# EAGLE board LoRa ST v4.1 (EAGLE 9.6.2)
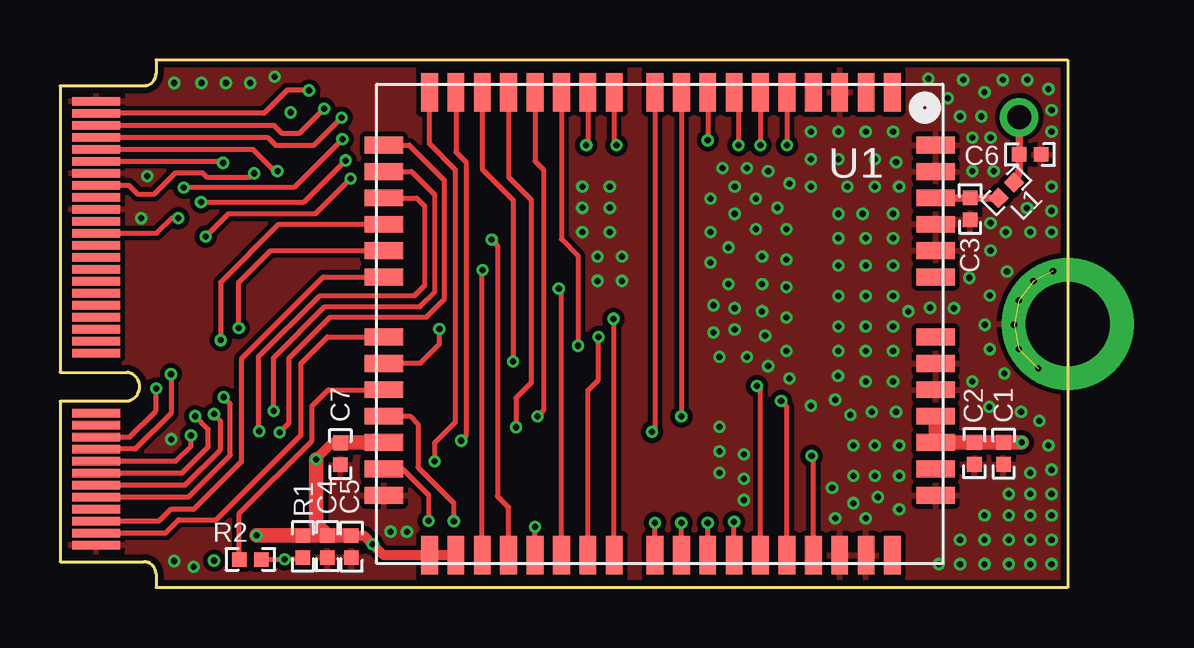
[diagram p0: board, top side]
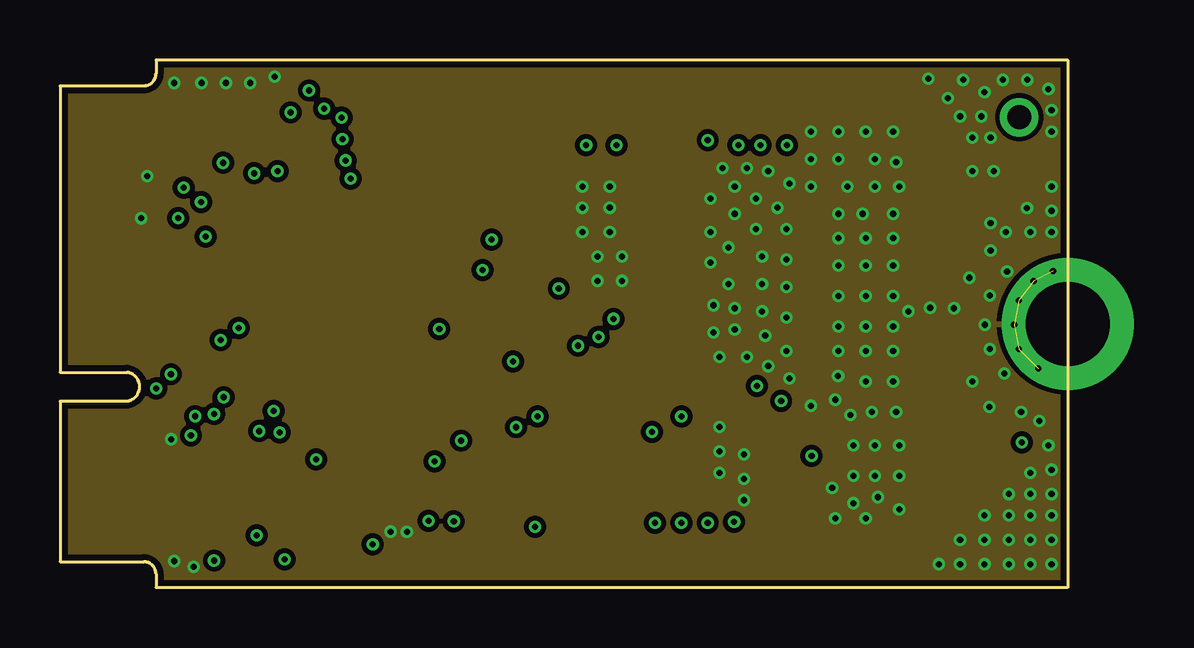
[diagram p1: board, inner layer Route2]
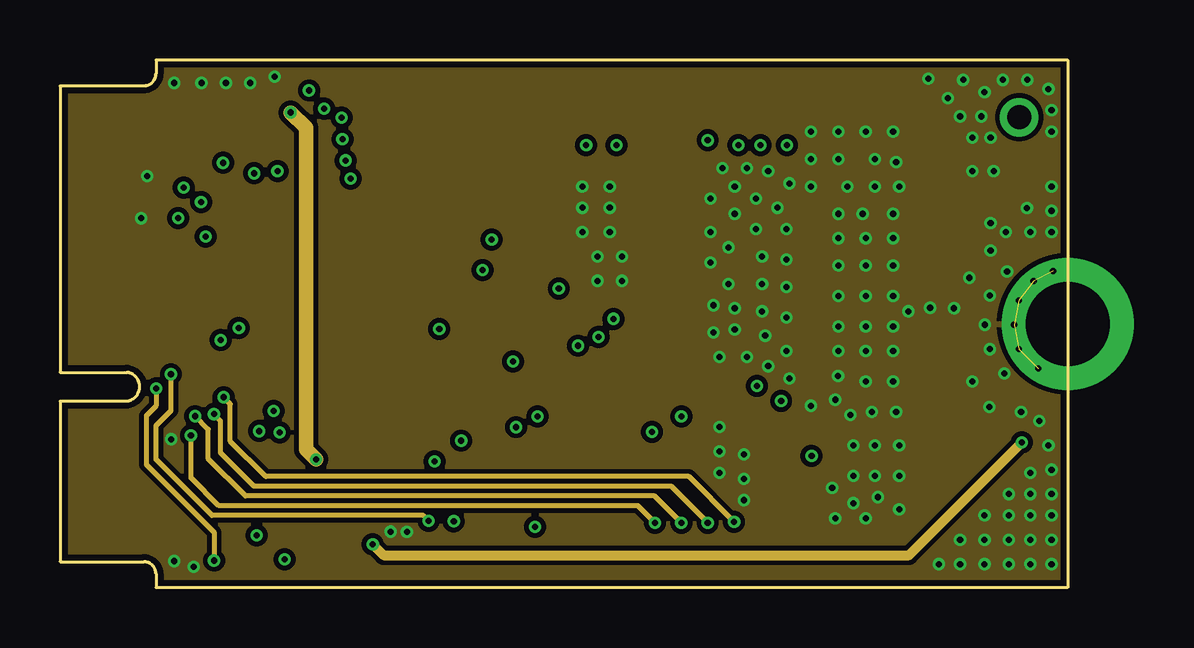
[diagram p2: board, inner layer Route15]
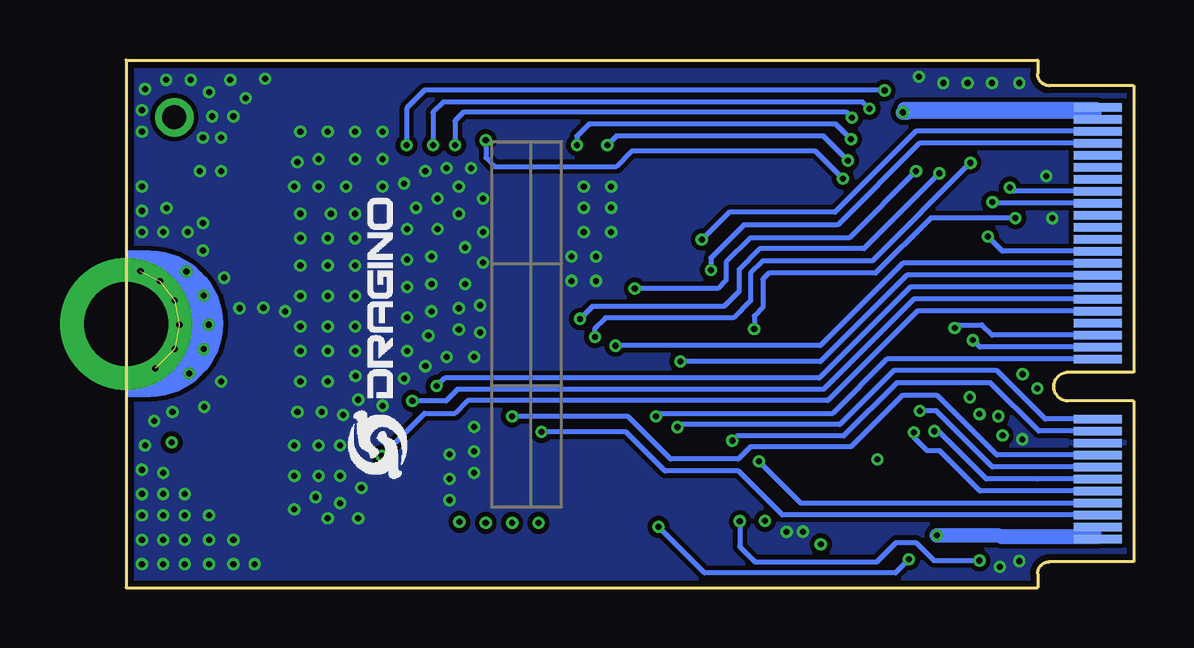
[diagram p3: board, bottom side, seen from below]

Size 42 x 22 mm. Coordinates in mm from the lower left corner, seen from the top.
Copper layers (1*2+15*16): Top 0.035mm / dielectric 1.5mm / Route2 0.035mm / dielectric 0.15mm / Route15 0.035mm / dielectric 0.2mm / Bottom 0.035mm
Design rules "default *": minimum track width 7mil, minimum drill 7mil, track to track 8mil, track to pad 8mil, pad to pad 8mil, via to via 8mil, smd to smd 8mil, copper to edge 10mil, drill to drill 6mil, minimum pad ring 5mil, minimum via ring 5mil, stop-mask expansion 1mil, vias tented up to drill 30mil, thermal gap 8mil
Net classes: 0 default: width 0.203 mm, clearance 0.152 mm; 1 vcc: width 0.254 mm; 2 gnd: width 0.305 mm, drill 0.33 mm, clearance 0.254 mm; 3 2layer-50ohm: width 0.305 mm, clearance 0.152 mm; 6 usbtrace-4layer: width 0.191 mm, clearance 0.152 mm

## Footprints (pad centres in the part's own frame; a part is rotated, then mirrored left to right if it is on the bottom)
C0402 = smd 0.61 x 0.61: 1 -0.457,0; 2 0.457,0
L-0402 = smd 0.61 x 0.61: 1 -0.457,0; 2 0.457,0
R0402 = smd 0.61 x 0.61: 1 -0.457,0; 2 0.457,0
LA66_APPLICATION_FRAME = smd 1.6 x 0.7: 1 -9.65,9.7; 2 -9.65,8.6; 3 -9.65,7.5; 4 -9.65,6.4; 5 -9.65,5.3; 6 -9.65,4.2; 7 -9.65,3.1; 8 -9.65,2; 9 -9.65,0.9; 10 -9.65,-0.2; 11 -9.65,-1.9; 12 -9.65,-3; 13 -9.65,-4.1; 14 -9.65,-5.2; 15 -9.65,-6.3; 16 -9.65,-7.4; 17 -9.65,-8.5; 18 -9.65,-9.6; 32 9.65,-9.6; 33 9.65,-8.5; 34 9.65,-7.4; 35 9.65,-6.3; 36 9.65,-5.2; 37 9.65,-4.1; 38 9.65,-3; 39 9.65,-1.9; 40 9.65,-0.2; 41 9.65,0.9; 42 9.65,2; 43 9.65,3.1; 44 9.65,4.2; 45 9.65,5.3; 46 9.65,6.4; 47 9.65,7.5; 48 9.65,8.6; 49 9.65,9.7 | smd 0.7 x 1.6: 19 -7.45,-11.5; 20 -6.35,-11.5; 21 -5.25,-11.5; 22 -4.15,-11.5; 23 -3.05,-11.5; 24 -1.95,-11.5; 25 0.55,-11.5; 26 1.65,-11.5; 27 2.75,-11.5; 28 3.85,-11.5; 29 4.95,-11.5; 30 6.05,-11.5; 31 7.15,-11.5; 50 7.15,11.5; 51 6.05,11.5; 52 4.95,11.5; 53 3.85,11.5; 54 2.75,11.5; 55 1.65,11.5; 56 0.55,11.5; 57 -1.95,11.5; 58 -3.05,11.5; 59 -4.15,11.5; 60 -5.25,11.5; 61 -6.35,11.5; 62 -7.45,11.5
LORA_ST_PCB = smd 0.35 x 2: 1 20.225,-40.5; 3 19.725,-40.5; 5 19.225,-40.5; 7 18.725,-40.5; 9 18.225,-40.5; 11 17.725,-40.5; 13 17.227,-40.5; 15 16.725,-40.5; 17 16.225,-40.5; 19 15.725,-40.5; 21 15.225,-40.5; 23 14.725,-40.5; 33 12.225,-40.5; 35 11.725,-40.5; 37 11.225,-40.5; 39 10.725,-40.5; 41 10.225,-40.5; 43 9.725,-40.5; 45 9.225,-40.5; 47 8.725,-40.5; 49 8.225,-40.5; 51 7.725,-40.5; 53 7.225,-40.5; 55 6.725,-40.5; 57 6.225,-40.5; 59 5.725,-40.5; 61 5.225,-40.5; 63 4.725,-40.5; 65 4.225,-40.5; 67 3.725,-40.5; 69 3.225,-40.5; 71 2.725,-40.5; 73 2.225,-40.5; 75 1.725,-40.5 | smd 0.35 x 2 bottom: 2 19.975,-40.5; 4 19.475,-40.5; 6 18.975,-40.5; 8 18.475,-40.5; 10 17.975,-40.5; 12 17.475,-40.5; 14 16.975,-40.5; 16 16.475,-40.5; 18 15.975,-40.5; 20 15.475,-40.5; 22 14.975,-40.5; 32 12.475,-40.5; 34 11.975,-40.5; 36 11.475,-40.5; 38 10.975,-40.5; 40 10.475,-40.5; 42 9.975,-40.5; 44 9.475,-40.5; 46 8.975,-40.5; 48 8.475,-40.5; 50 7.975,-40.5; 52 7.475,-40.5; 54 6.975,-40.5; 56 6.475,-40.5; 58 5.975,-40.5; 60 5.475,-40.5; 62 4.975,-40.5; 64 4.475,-40.5; 66 3.975,-40.5; 68 3.475,-40.5; 70 2.975,-40.5; 72 2.475,-40.5; 74 1.975,-40.5 | drill 3.5 pad 5.5: 76 11,0

## Placement (x,y rotation side)
C1  2.2uF  [C0402]  39.33,5.59 90 top
C2  0.1uF  [C0402]  38.11,5.59 270 top
C3  NC  [C0402]  37.94,15.79 90 top
C4  2.2uF  [C0402]  11.14,1.71 270 top
C5  0.1uF  [C0402]  12.15,1.71 90 top
C6  NC  [C0402]  40.44,18.06 180 top
C7  0.1uF  [C0402]  11.69,5.58 90 top
L1  9.1nH  [L-0402]  39.44,16.57 45 top
R1  10K  [R0402]  10.12,1.71 270 top
R2  2K  [R0402]  7.94,1.17 180 top
U1  LA66_APPLICATION_FRAME  [LA66_APPLICATION_FRAME]  25,11 270 top
U3  NGFF_M2_KEY_E_CORE  [LORA_ST_PCB]  42,22 270 top
U$2  [LOGO-SILK-NEW]  30.27,4.54 90 bottom

## Library data of the parts
C1-C7 = dragino-passive
L1 = inductor-neosid
R1 R2 U1 U3 U$2 = dragino

## Nets
GND: C1.1 C2.2 C3.1 C4.2 C5.1 C6.1 C7.1 U1.3 U1.31 U1.47 U1.48 U1.50 U1.54 U1.55 U1.58 U1.59 U1.61 U1.62 U3.1 U3.18 U3.57 U3.63 U3.75 U3.76
N$1: C3.2 L1.1 U1.60
N$2: C6.2 L1.2
PA0: U1.6 U3.71
PA1: U1.5 U3.73
PA2: U1.8 U3.50
PA3: U1.7 U3.69
PA4: U1.39 U3.61
PA5: U1.38 U3.65
PA6: U1.9 U3.16
PA7: U1.10 U3.6
PA8: U1.37 U3.67
PA9: U1.30 U3.17
PA11: R1.2 R2.1 U1.36
PA12: R2.2 U1.27
PA13: U1.28 U3.19
PA14: U1.11 U3.60
PA15: U1.12 U3.58
PB0: U1.34 U3.68
PB1: U1.35 U3.70
PB7: U1.13 U3.48
PB8: U1.15 U3.22
PB9: U1.14 U3.32
PB10: U1.17 U3.20
PB11: U1.16 U3.46
PB12: U1.19 U3.10
PB13: U1.18 U3.8
PB14: U1.20 U3.14
PB15: U1.21 U3.12
PC0: U1.44 U3.44
PC1: U1.43 U3.9
PC2: U3.38
PC3: U1.46 U3.40
PC4: U1.45 U3.42
PC5: U1.42 U3.11
PC8: U1.41 U3.13
PC9: U1.40 U3.15
PC12: U1.22 U3.34
PC13: U1.23 U3.36
PD10: U1.25 U3.3
PD14: U1.24 U3.5
RSTN_PIN: U1.26 U3.53
VDD: C1.2 C2.1 C4.1 C5.2 C7.2 R1.1 U1.29 U1.32 U1.33 U1.52 U1.53 U3.2 U3.4 U3.72 U3.74

## Tracks (layer width: path | path; a pad name or v marks a point on that pad's centre or on a via)
GND  (via drill 0.25)  (5 unrouted)
  other vias: 3.64,17.16 3.39,15.4 4.63,6.18 5.58,0.87 4.76,1.1 7.93,21.04 6.92,21.04 5.9,21.04 4.76,21.04 14.46,2.33 8.95,21.3 21.77,16.73 21.77,15.84 22.92,16.73 21.77,14.82 22.92,15.84 22.92,14.82 22.41,13.8 22.41,12.79 23.43,12.79 23.43,13.8 27.49,6.69 27.49,5.68 27.49,4.79 28.51,5.55 28.51,4.53 28.51,3.64 37.52,0.98 38.54,0.98 39.55,0.98 40.44,0.98 41.33,0.98 37.52,1.99 38.54,1.99 39.55,1.99 40.44,1.99 41.33,1.99 38.54,3.01 39.55,3.01 40.44,3.01 41.33,3.01 39.55,3.9 40.44,3.9 41.33,3.9 40.44,4.79 41.33,4.91 41.21,5.93 40.82,6.95 38.73,7.54 40.06,7.33 38.03,8.6 37.27,11.65 36.27,11.67 38.79,14.06 37.9,12.92 39.43,14.82 38.79,15.2 40.44,14.82 41.33,14.82 41.33,15.71 41.33,16.73 38.03,17.36 38.92,17.36 38.03,18.76 38.79,18.76 37.52,19.65 38.41,19.65 38.54,20.66 39.3,21.17 40.32,21.17 41.21,20.79 41.33,19.01 41.33,19.9 37.65,21.17 37.01,20.41 31.3,19.01 32.44,19.01 33.59,19.01 34.73,19.01 31.3,17.87 31.3,16.73 32.82,16.73 33.97,16.73 34.98,16.73 34.86,17.74 33.97,17.87 32.44,17.87 32.44,15.58 33.46,15.58 34.73,15.58 32.44,14.57 33.59,14.57 34.73,14.57 32.44,13.42 33.59,13.42 34.73,13.42 32.44,12.15 33.59,12.15 34.73,12.15 32.44,10.88 33.59,10.88 34.73,10.88 35.36,11.52 32.44,9.87 33.59,9.87 34.73,9.87 32.43,8.82 33.59,8.6 34.73,8.6 32.95,7.2 33.84,7.33 34.86,7.33 33.08,5.93 33.97,5.93 34.98,5.93 33.08,4.66 33.97,4.66 34.98,4.66 33.08,3.52 34.09,3.77 34.98,3.26 32.32,2.88 33.59,2.88 32.19,4.15 31.3,7.58 32.32,7.84 30.41,8.72 29.52,9.23 30.28,9.87 29.39,10.5 28.63,9.61 27.49,9.61 27.24,10.63 27.24,11.77 28.12,11.65 29.27,11.52 30.28,11.26 30.28,12.53 29.27,12.66 27.87,12.66 28.12,10.76 27.11,13.55 27.11,14.82 27.11,16.22 28.12,15.58 27.87,14.19 29.27,13.8 30.28,13.68 30.28,14.95 29.01,14.95 29.01,16.22 28.12,16.73 29.9,15.84 30.41,16.85 29.52,17.36 28.63,17.49 27.62,17.49 36.63,0.98 36.2,21.22 13.78,2.33 41.4,13.19 40.58,12.79 39.97,11.97 39.77,10.96 39.97,9.94 40.79,9.13 39.37,8.92 38.76,9.94 38.55,10.96 38.76,12.18 39.48,13.18 40.31,15.83
  pour Top: -0.8,22.89 42.89,22.89 42.89,-0.73 -0.8,-0.73
  pour Bottom: -0.8,22.89 42.89,22.89 42.89,-0.73 -0.8,-0.73
  pour Route15: -0.8,22.89 42.89,22.89 42.89,-0.73 -0.8,-0.73
  pour Route2: -0.8,22.89 42.89,22.89 42.89,-0.73 -0.8,-0.73
N$1
  Top 0.305: U1.60 C3.2 L1.1
N$2  (via drill 1 pad 1.6)
  Top 0.305: L1.2 arc45 39.98,17.41 C6.2 arc45 C6.2 v39.98,19.61
PA0  (via drill 0.25)
  Top 0.203: U3.71 8.91,19.27 9.23,18.95 10,18.95 v11.01,19.97 | U1.6 v29.2,18.45
  Bottom 0.203: v11.01,19.97 11.29,20.25 28.77,20.25 29.2,19.81 v29.2,18.45
PA1  (via drill 0.25)
  Top 0.203: U3.73 8.51,19.77 9.46,20.73 v10.38,20.73 | v30.3,18.44 v30.3,18.45 U1.5
  Bottom 0.203: v30.3,18.44 30.3,19.98 29.55,20.73 v10.38,20.73
PA2  (via drill 0.25)
  Top 0.203: v6.08,14.64 7.02,15.58 10.64,15.58 v12.11,17.05 | v27,18.65 U1.8
  Bottom 0.203: v6.08,14.64 5.46,14.03 U3.50 | v12.11,17.05 13.25,18.19 20.92,18.19 21.55,17.55 26.63,17.55 27,17.92 v27,18.65
PA3  (via drill 0.25)
  Top 0.203: U3.69 8.65,18.77 8.98,18.44 10.59,18.44 v11.74,19.6 | v28.28,18.44 28.28,19.99 28.1,20.18 U1.7
  Bottom 0.203: v11.74,19.6 11.96,19.82 27.93,19.82 28.28,19.46 v28.28,18.44
PA4  (via drill 0.25)
  Top 0.203: U3.61 2.87,16.77 3.23,16.41 3.93,16.41 4.82,17.3 5.93,17.3 6.12,17.12 7.94,17.12 v8.09,17.27 | v23.08,11.21 23.1,11.18 U1.39
  Bottom 0.203: v23.08,11.21 22.55,11.73 17.06,11.73 16.45,12.34 16.45,13.26 15.58,14.13 11.24,14.13 v8.09,17.27
PA5  (via drill 0.25)
  Top 0.203: v6.79,17.71 6.73,17.77 U3.65 | v22.44,10.44 22.44,8.66 22,8.22 U1.38
  Bottom 0.203: v22.44,10.44 22.44,10.82 22.02,11.25 16.68,11.25 15.96,11.97 15.96,13.11 15.46,13.62 10.89,13.62 v6.79,17.71
PA6  (via drill 0.25)
  Top 0.203: v25.9,7.14 | U1.9 v25.9,7.14
  Bottom 0.203: U3.16 5.7,5.52 8.18,8.01 9.64,8.01 11.77,5.87 15.96,5.87 16.47,5.36 19.3,5.36 21.07,7.14 v25.9,7.14
PA7  (via drill 0.25)
  Top 0.203: v24.67,6.5 24.8,6.62 U1.10
  Bottom 0.203: v24.67,6.5 21.16,6.5 19.52,4.86 16.47,4.86 14.64,3.02 U3.6
PA8  (via drill 0.25)
  Top 0.203: v9.07,17.36 8.95,17.36 8.04,18.27 U3.67 | v20.79,12.47 20.9,12.37 U1.37
  Bottom 0.203: v20.79,12.47 17.33,12.47 16.98,12.82 16.98,13.57 15.96,14.58 11.84,14.58 v9.07,17.36
PA9  (via drill 0.25)
  Top 0.203: U1.30 14.28,4.95 15.36,3.87 v15.36,2.79 | v4.63,8.89 4.63,7.26 3.14,5.77 U3.17
  Route15 0.203: v15.36,2.79 15.15,3 6.34,3 4,5.34 4,6.76 4.63,7.38 v4.63,8.89
PA11  (via drill 0.25)
  Top 0.203: U1.36 v19.8,2.52 v19.8,2.53 | R2.1 v9.36,1.17 10.04,1.17 R1.2
  Bottom 0.203: v9.36,1.17 9.92,0.61 17.88,0.61 v19.8,2.53
PA12
  Top 0.203: R2.2 7.48,3.1 10.5,6.12 10.5,7.57 11.18,8.25 U1.27
PA13  (via drill 0.25)
  Top 0.203: U1.28 14.58,7.15 14.93,6.81 14.93,5.02 16.41,3.53 v16.41,2.77 | U3.19 2.91,6.28 4,7.37 v4,8.3
  Route15 0.203: v4,8.3 4,7.57 3.59,7.17 3.59,5.13 6.42,2.31 v6.42,1.12
  Bottom 0.203: v16.41,2.77 16.41,1.7 15.79,1.07 10.71,1.07 9.89,1.88 9.08,1.88 8.32,1.12 v6.42,1.12
PA14  (via drill 0.25)
  Top 0.203: v11.77,18.7 9.76,16.68 v5.16,16.68 | U1.11 23.1,18.55 v23.2,18.44
  Bottom 0.203: v5.16,16.68 5.01,16.52 U3.60 | v11.77,18.7 12.41,19.33 22.7,19.33 23.2,18.82 v23.2,18.44
PA15  (via drill 0.25)
  Top 0.203: v11.9,17.81 10.17,16.07 v5.88,16.07 | v21.93,18.44 22,18.51 U1.12
  Bottom 0.203: v5.88,16.07 5.83,16.02 U3.58 | v11.9,17.81 12.92,18.82 21.55,18.82 v21.93,18.44
PB0  (via drill 0.25)
  Top 0.203: v17.62,13.24 17.6,13.22 U1.34
  Bottom 0.203: U3.68 8.92,18.52 12.33,15.12 16.24,15.12 17.62,13.74 v17.62,13.24
PB1  (via drill 0.25)
  Top 0.203: v18,14.51 18.24,14.27 18.24,3.81 18.7,3.35 U1.35
  Bottom 0.203: U3.70 9.07,19.02 12.44,15.65 16.85,15.65 v18,14.51
PB7  (via drill 0.25)
  Top 0.203: v21.6,10.08 21.6,13.83 20.9,14.53 U1.13
  Bottom 0.203: U3.48 9.61,13.53 13.05,10.08 v21.6,10.08
PB8  (via drill 0.25)
  Top 0.203: v19.01,6.69 19.01,7.9 19.64,8.53 19.64,16.17 18.7,17.11 U1.15
  Bottom 0.203: U3.22 3.69,7.03 5.71,9.05 10,9.05 12.25,6.8 18.9,6.8 v19.01,6.69
PB9  (via drill 0.25)
  Top 0.203: v19.9,7.14 20.16,7.39 20.16,17.43 19.8,17.78 U1.14
  Bottom 0.203: U3.32 10.28,9.53 12.54,7.27 19.77,7.27 v19.9,7.14
PB10  (via drill 0.25)
  Top 0.203: v16.73,6.12 16.92,6.32 16.92,17.75 16.5,18.16 U1.17
  Bottom 0.203: U3.20 3.95,6.53 5.96,8.54 9.87,8.54 12.09,6.32 16.54,6.32 v16.73,6.12
PB11  (via drill 0.25)
  Top 0.203: v18.89,9.43 18.89,16.16 17.6,17.44 U1.16
  Bottom 0.203: U3.46 9.45,13.03 13.04,9.43 v18.89,9.43
PB12  (via drill 0.25)
  Top 0.203: v9.16,6.46 9.54,6.85 9.54,9.55 11.25,11.26 15.27,11.26 16.02,12.01 16.02,17 14.56,18.45 U1.19
  Bottom 0.203: U3.10 6.4,4.02 8.09,5.71 8.61,5.71 9.16,6.26 v9.16,6.46
PB13  (via drill 0.25)
  Top 0.203: v15.61,5.26 15.61,6.03 16.47,6.89 16.47,17.43 15.4,18.5 U1.18
  Bottom 0.203: v15.61,5.26 13.88,3.52 U3.8
PB14  (via drill 0.25)
  Top 0.203: v8.9,7.37 8.9,9.58 11.04,11.71 15.02,11.71 15.61,12.31 15.61,16.39 14.65,17.35 U1.20
  Bottom 0.203: U3.14 5.88,5.02 8.22,7.37 v8.9,7.37
PB15  (via drill 0.25)
  Top 0.203: v8.3,6.52 8.27,6.55 8.27,9.61 10.83,12.16 14.76,12.16 15.2,12.6 15.2,15.9 14.86,16.25 U1.21
  Bottom 0.203: v8.3,6.52 8.14,6.52 6.14,4.52 4,4.52 U3.12
PC0  (via drill 0.25)
  Top 0.203: v29.05,8.41 29.2,8.26 U1.44
  Bottom 0.203: U3.44 9.31,12.53 13.1,8.74 28.72,8.74 v29.05,8.41
PC1  (via drill 0.25)
  Top 0.203: U3.9 5.36,3.77 7.1,5.52 7.1,7.66 v6.82,7.94 | U1.43 v28.1,2.73
  Route15 0.203: v28.1,2.73 26.21,4.63 8.57,4.63 7.1,6.1 7.1,7.66 v6.82,7.94
PC3  (via drill 0.25)
  Top 0.203: v31.33,5.49 31.4,5.42 U1.46
  Bottom 0.203: U3.40 9.01,11.53 12.75,7.79 27.76,7.79 28.28,7.27 29.55,7.27 v31.33,5.49
PC4  (via drill 0.25)
  Top 0.203: v30.06,7.78 30.3,7.54 U1.45
  Bottom 0.203: U3.42 9.16,12.03 12.92,8.26 28.18,8.26 28.66,7.78 v30.06,7.78
PC5  (via drill 0.25)
  Top 0.203: U3.11 5.23,4.27 6.69,5.74 6.69,6.96 v6.42,7.23 | U1.42 v27,2.7
  Route15 0.203: v27,2.7 25.48,4.22 8.09,4.22 6.69,5.62 6.69,6.96 v6.42,7.23
PC8  (via drill 0.25)
  Top 0.203: U3.13 5.09,4.77 6.19,5.87 6.19,6.59 v5.63,7.15 | U1.41 v25.9,2.7
  Route15 0.203: v25.9,2.7 24.78,3.81 7.73,3.81 6.19,5.36 6.19,6.59 v5.63,7.15
PC9  (via drill 0.25)
  Top 0.203: U3.15 4.83,5.27 5.46,5.91 v5.46,6.34 | U1.40 v24.8,2.69
  Route15 0.203: v24.8,2.69 24.08,3.41 6.62,3.41 5.46,4.57 v5.46,6.34
PC12  (via drill 0.25)
  Top 0.203: v6.69,10.32 6.69,12.73 9.12,15.15 U1.22
  Bottom 0.203: v6.69,10.32 6.4,10.03 U3.34
PC13  (via drill 0.25)
  Top 0.203: v7.46,10.82 7.46,12.73 8.78,14.05 U1.23
  Bottom 0.203: v7.46,10.82 7.33,10.95 6.31,10.95 5.89,10.53 U3.36
PD10
  Top 0.203: U3.3 4.4,2.27 4.95,2.82 6.51,2.82 10.05,6.36 10.05,9.35 11.15,10.45 U1.25
PD14
  Top 0.203: U3.5 4.13,2.77 4.61,3.25 5.57,3.25 7.56,5.24 7.56,9.53 10.98,12.95 U1.24
RSTN_PIN  (via drill 0.25)
  Top 0.203: v4.92,15.41 4.67,15.41 4.03,14.78 U3.53 | v15.81,10.78 15.81,10.14 15.02,9.35 U1.26
  Bottom 0.203: v4.92,15.41 v4.93,15.41 8.45,15.41 10.76,13.11 15.2,13.11 15.46,12.86 15.46,11.69 15.81,11.33 v15.81,10.78
VDD  (via drill 0.25)
  Top 0.406: U1.33 U1.32 13.5,1.35 v13.04,1.81 12.68,2.17 C5.2 | C7.2 11.35,6.03 10.67,5.36 v10.67,5.34
  Top 0.61: C4.1 R1.1 v8.19,2.17 | C5.2 C4.1 | v10.67,5.34 10.67,2.64 C4.1 | U1.29 11.71,6.05 C7.2 | v40.09,6.05 C1.2 C2.1 U1.52 U1.53
  Route15 0.406: v40.09,6.05 35.39,1.35 13.5,1.35 v13.04,1.81
  Route15 0.61: v9.62,19.81 10.25,19.18 10.25,5.76 v10.67,5.34
  Bottom 0.203: U3.4 1.54,2.48 1.54,2.23 | 5.66,2.17 5.61,2.17 5.55,2.23
  Bottom 0.305: v9.62,19.81 9.62,19.69 1.67,19.69 U3.72 U3.74
  Bottom 0.406: U3.2 5.51,2.02 5.55,2.06 5.55,2.23 1.54,2.23 | U3.74 9.62,20.02
  Bottom 0.61: v9.62,19.81 9.45,19.81 | v8.19,2.17 5.66,2.17

## Text on the board
bDocu: 915MHZ | 868MHZ | 433MHZ | LoRa ST v4.1